# Altium PCB io9_idc.PcbDoc
Units mm, origin at the board's own origin, x right, y up, seen from the top; angles counter-clockwise.
Board outline 115.8 x 140.7 mm, 2 copper layers (Top Layer, Bottom Layer); 22 components, 84 nets, 391 pads, 198 vias.
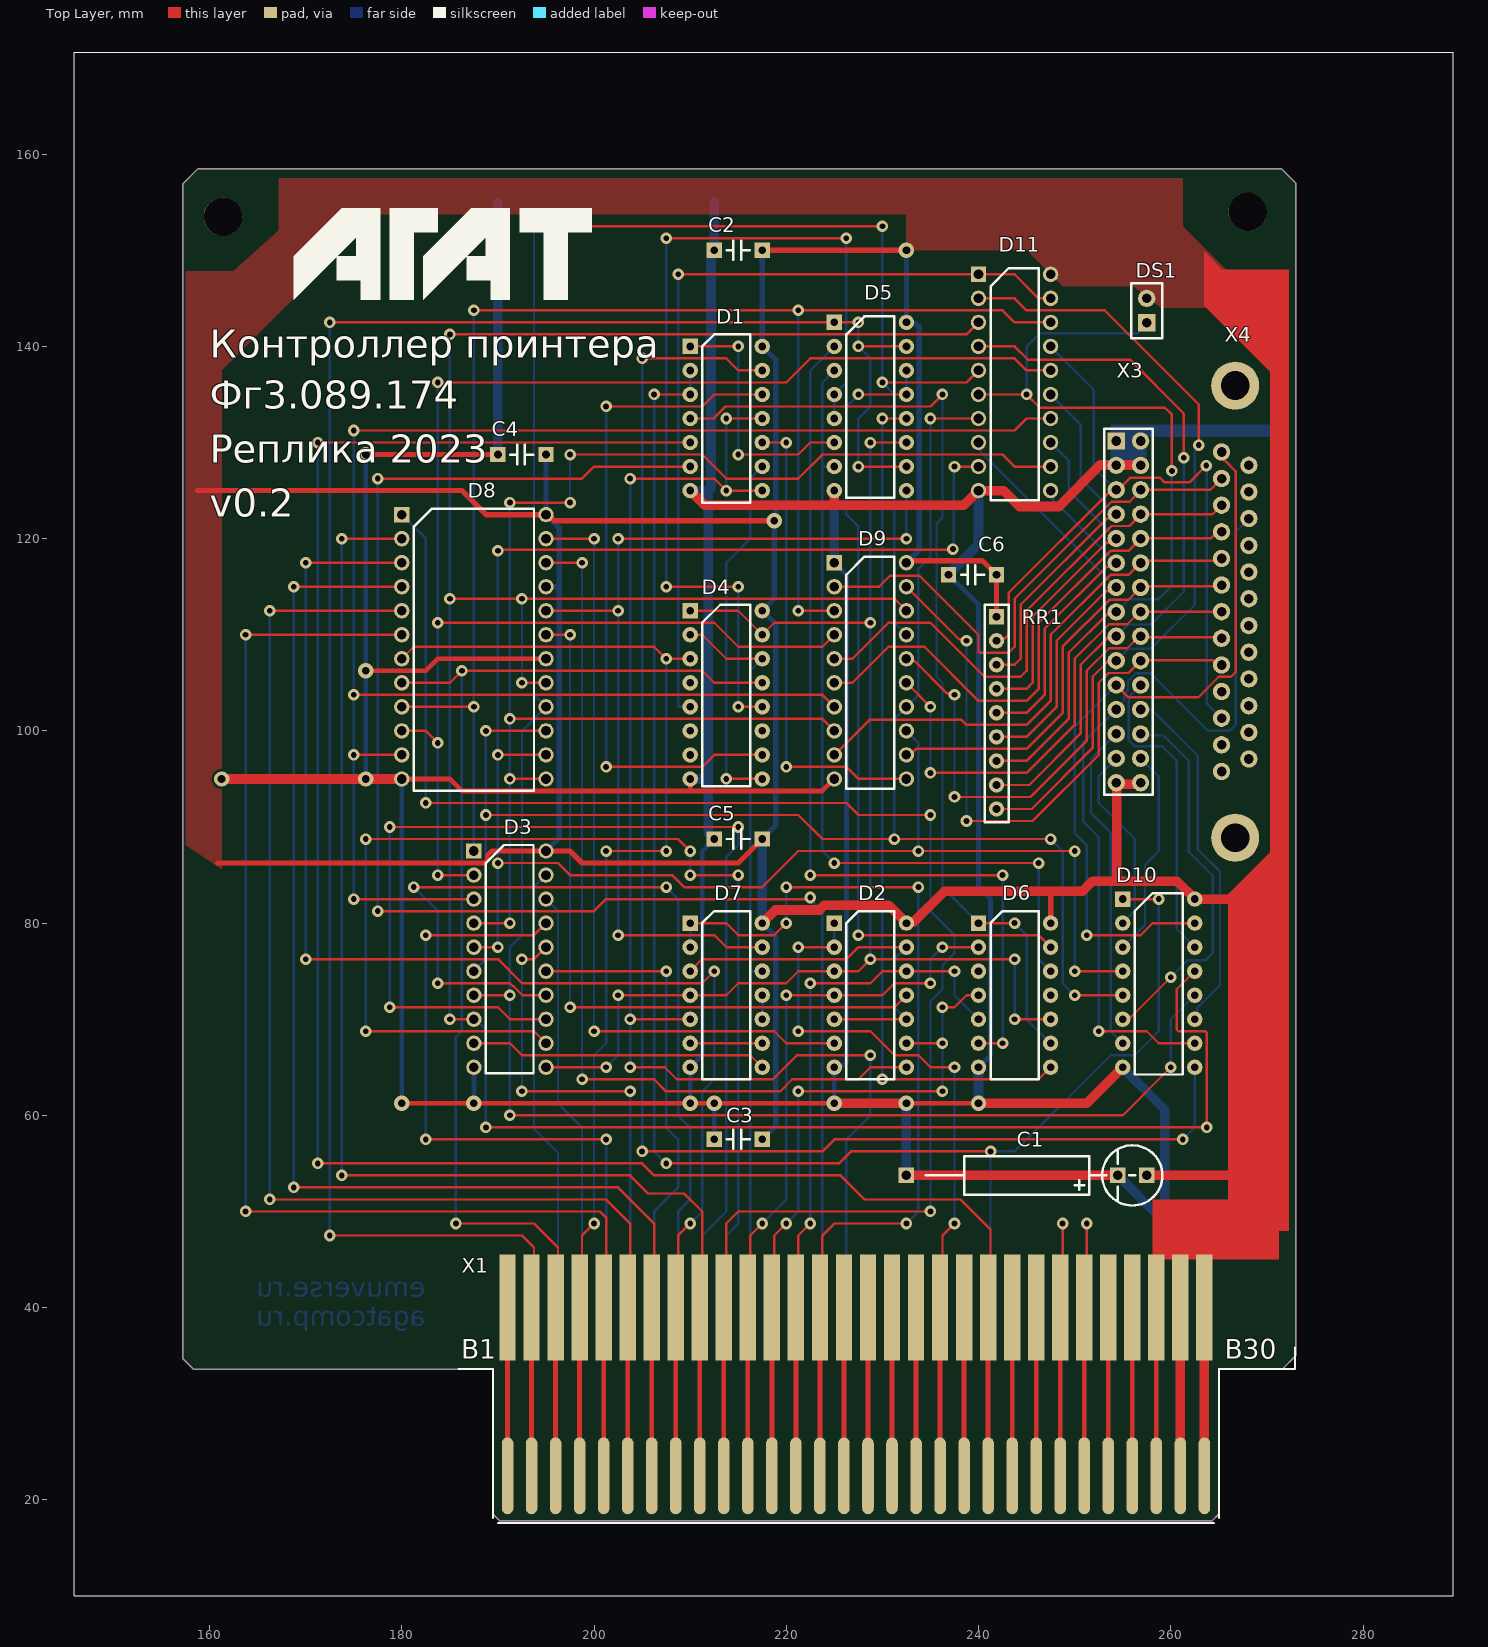
[diagram p0: Top Layer view]
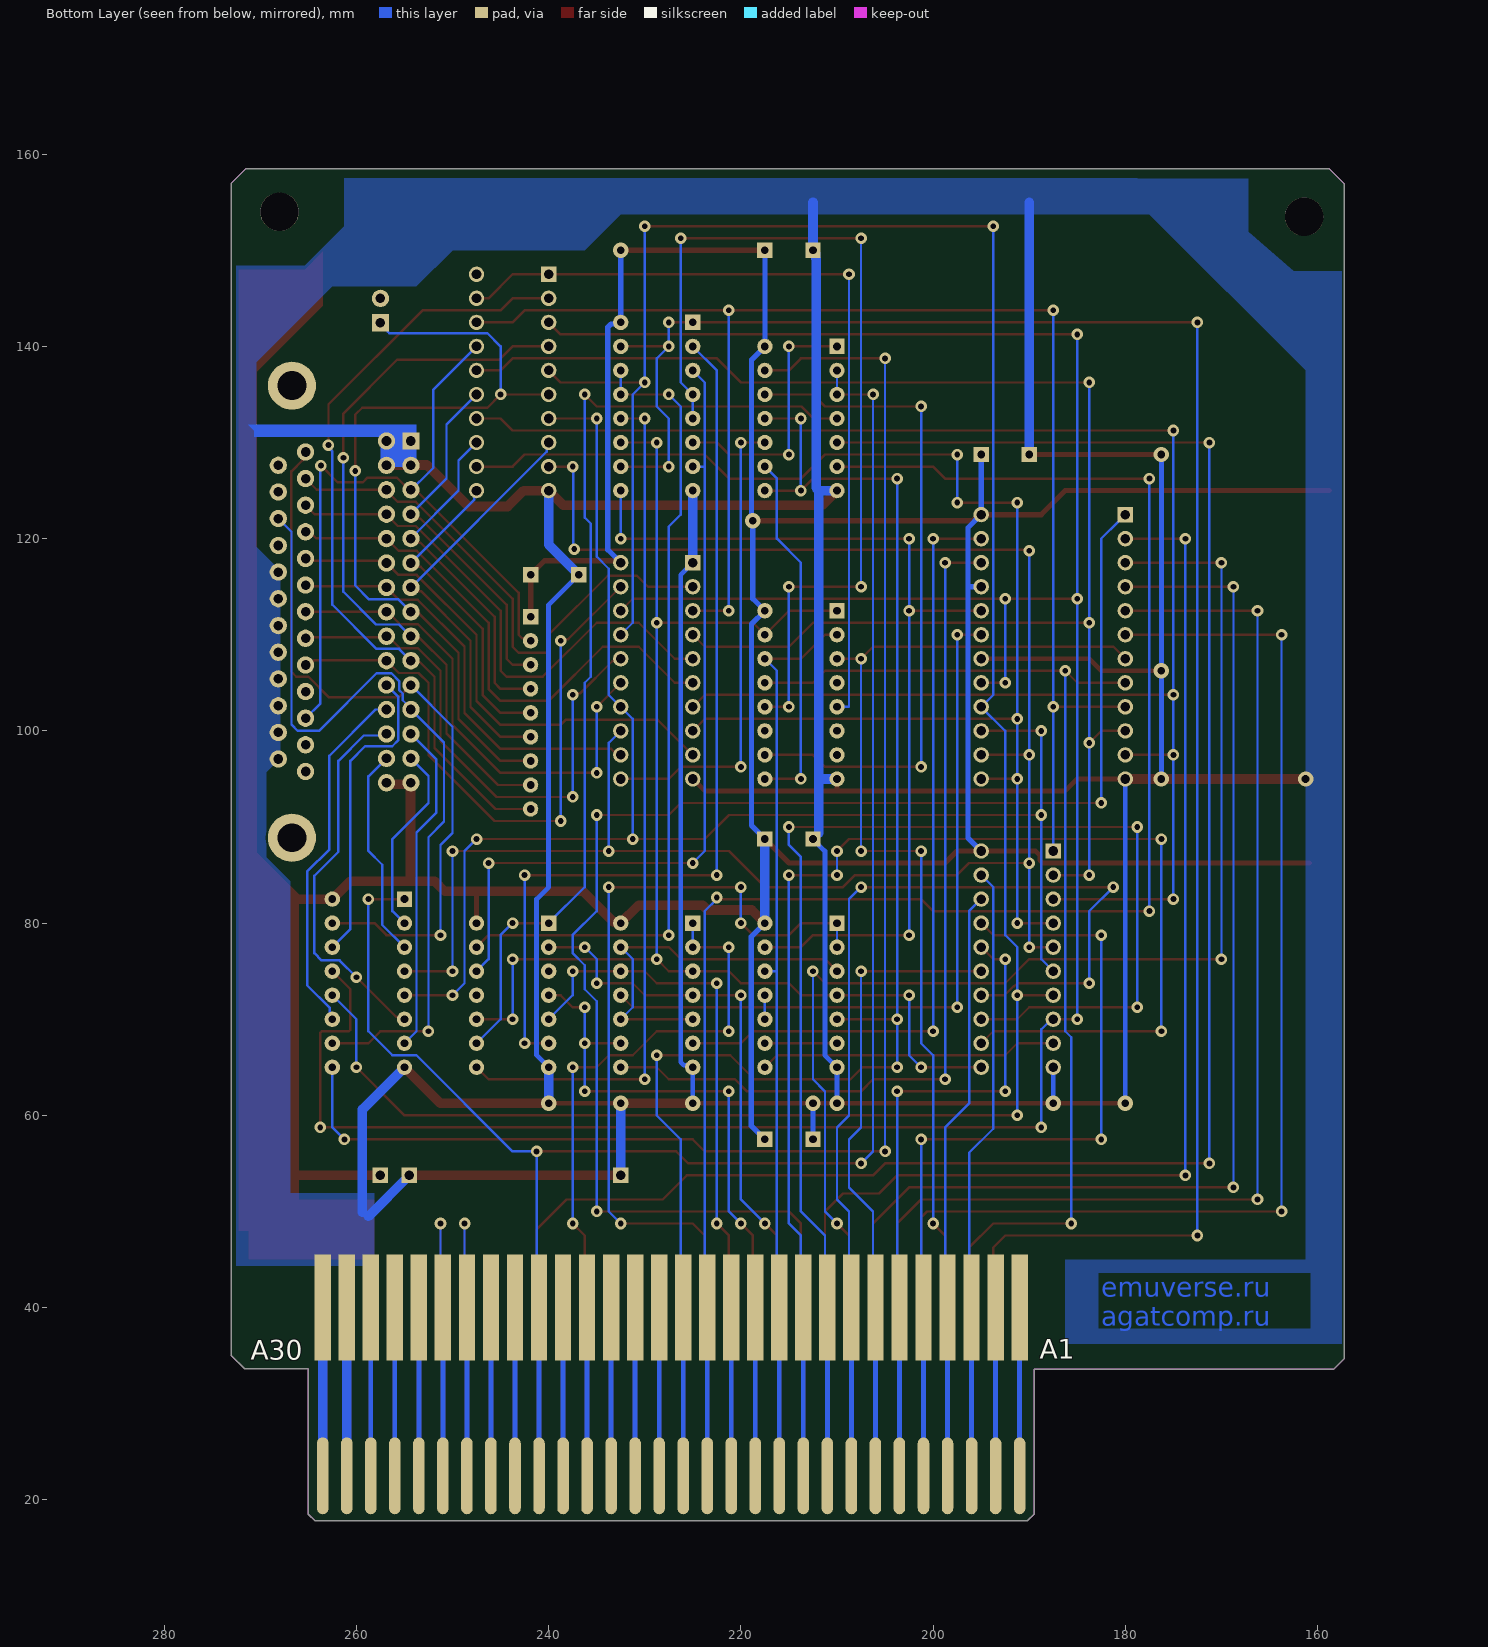
[diagram p1: Bottom Layer view, seen from below]

## Layer stack, top to bottom
Top Solder: solder mask 0.0102, Solder Resist, Dk 3.5
Top Layer: signal copper 0.0356
Dielectric 1: dielectric 0.32, FR-4, Dk 4.8
Bottom Layer: signal copper 0.0356
Bottom Solder: solder mask 0.0102, Solder Resist, Dk 3.5

## Board outline
157.2,34.7 158.3,33.6 189.5,33.6 189.5,18.5 190.2,17.8 264.3,17.8 265,18.5 265,33.625 271.625,33.625 273,35 273,157 271.5,158.5 158.8,158.5 157.2,156.9

## Design rules (kind name [scope] priority, off if disabled: settings)
Clearance [All] p1: gap=0.254 ignorepadtopadclearanceinfootprint=FALSE except(0: Arc-Hole Track-Hole SMDPad-Hole THPad-Hole Via-Hole Fill-Hole Poly-Hole Region-Hole Text-Hole; 0.2: Arc-Arc Arc-Track Arc-SMDPad Arc-THPad Arc-Via Arc-Fill Arc-Poly Arc-Region Arc-Text Track-Track Track-SMDPad Track-THPad Track-Via Track-Fill Track-Poly Track-Region Track-Text)
HoleSize [All] p1: absolutevalues=TRUE maxlimit=5 minlimit=0.025 maxpercent=80.000 minpercent=20.000
PolygonConnect [All] p1: connectstyle=Direct reliefconductorwidth=0.254 reliefentries=4 polygonreliefangle="90 Angle" airgapwidth=0.254
RoutingVias [All] p1: holewidth=0.711 width=1.27 viastyle="Through Hole" minholewidth=0.711 minwidth=1.27 maxholewidth=0.711 maxwidth=1.27
SilkToSilkClearance [All] p1: silktosilkclearance=0.2
SilkToSolderMaskClearance [IsPad] p1: minsilkscreentomaskgap=0.2 clearancetoexposedcopper=TRUE
SolderMaskExpansion [All] p1: expansion=0.102 istentingtop=FALSE
Width [All] p1: maxlimit=2 minlimit=0.2 preferedwidth=0.25
27 further rules are at their usual default settings.

## Components (designator, comment, footprint, x,y, rotation, side; value= is the part's Value field where it differs from the comment)
C1 "47,0 х 16 в" CP30 257.5,53.75 r270 top
C2 "0,1 мкф" C5 212.5,150 r90 top
C3 "0,1 мкф" C5 212.5,57.5 r90 top
C4 "0,1 мкф" C5 190,128.75 r90 top
C5 "0,1 мкф" C5 212.5,88.75 r90 top
C6 "0,1 мкф" C5 236.875,116.25 r90 top
D1 "К555ЛЕ1" 201.14 210,140 r0 top
D2 "К555ЛЛ1" 201.14 225,80 r0 top
D3 "КР580ВА86" 2140.20 187.5,87.5 r0 top
D4 "К555ИД4" 201.16 210,112.5 r0 top
D5 "КР559ИП7" 201.16 225,142.5 r0 top
D6 "К555ЛИ6" 201.14 240,80 r0 top
D7 "К555ЛА3" 201.14 210,80 r0 top
D8 "К573РФ2" "2120.24 socket" 180,122.5 r0 top
D9 "К555ИР27" 201.20 225,117.5 r0 top
D10 "К555ТМ8" 201.16 255,82.5 r0 top
D11 "К555АП5" 201.20 240,147.5 r0 top
DS1 "HEADER_2x1" HEADER_2X1 257.5,142.46 r90 top
RR1 "1 к" НР1-4-8 241.875,111.875 r0 top
X1 "Agat-Ext-io9" AGAT_EXT 31.646,17.33 r0 top
X3 "IDC-30" IDC30 254.329,130.165 r270 top
X4 "DB25" DB25 265.285,129.02 r0 top

## Footprints (in the part's own frame and the unit in brackets; to place one, negate y for a bottom-side part, rotate by r counter-clockwise, add the part's x,y. Pads: shape width x height; smd on the part's side, far side on the other; paste and mask are expansions set on the pad)
201.14 [mm]
  rect 1.6x1.6 hole 0.8: 1(0,0)
  round 1.6 hole 0.8: 2(0,-2.5) 3(0,-5) 4(0,-7.5) 5(0,-10) 6(0,-12.5) 7(0,-15) 8(7.5,-15) 9(7.5,-12.5) 10(7.5,-10) 11(7.5,-7.5) 12(7.5,-5) 13(7.5,-2.5) 14(7.5,0)
  silkscreen extent 1.25,-16.25 6.25,1.25, body extent -0.13,-16.55 7.63,1.55, height 4.5
201.16 [mm]
  rect 1.6x1.6 hole 0.8: 1(0,0)
  round 1.6 hole 0.8: 2(0,-2.5) 3(0,-5) 4(0,-7.5) 5(0,-10) 6(0,-12.5) 7(0,-15) 8(0,-17.5) 9(7.5,-17.5) 10(7.5,-15) 11(7.5,-12.5) 12(7.5,-10) 13(7.5,-7.5) 14(7.5,-5) 15(7.5,-2.5) 16(7.5,0)
  silkscreen extent 1.25,-18.25 6.25,0.63, body extent -0.13,-19.05 7.63,1.55, height 4.5
201.20 [mm]
  rect 1.6x1.6 hole 1: 1(0,0)
  round 1.6 hole 1: 2(0,-2.5) 3(0,-5) 4(0,-7.5) 5(0,-10) 6(0,-12.5) 7(0,-15) 8(0,-17.5) 9(0,-20) 10(0,-22.5) 11(7.5,-22.5) 12(7.5,-20) 13(7.5,-17.5) 14(7.5,-15) 15(7.5,-12.5) 16(7.5,-10) 17(7.5,-7.5) 18(7.5,-5) 19(7.5,-2.5) 20(7.5,0)
  silkscreen extent 1.25,-23.5 6.25,0.63, body extent 0.02,-24.2 7.78,1.4, height 4.5
"2120.24 socket" [mm]
  rect 1.6x1.6 hole 1: 1(0,0)
  round 1.6 hole 1: 2(0,-2.5) 3(0,-5) 4(0,-7.5) 5(0,-10) 6(0,-12.5) 7(0,-15) 8(0,-17.5) 9(0,-20) 10(0,-22.5) 11(0,-25) 12(0,-27.5) 13(15,-27.5) 14(15,-25) 15(15,-22.5) 16(15,-20) 17(15,-17.5) 18(15,-15) 19(15,-12.5) 20(15,-10) 21(15,-7.5) 22(15,-5) 23(15,-2.5) 24(15,0)
  silkscreen extent 1.25,-28.75 13.75,0.63, body extent -1.39,-28.98 16.39,1.5, height 8.2
2140.20 [mm]
  rect 1.6x1.6 hole 1: 1(0,0)
  round 1.6 hole 1: 2(0,-2.5) 3(0,-5) 4(0,-7.5) 5(0,-10) 6(0,-12.5) 7(0,-15) 8(0,-17.5) 9(0,-20) 10(0,-22.5) 11(7.5,-22.5) 12(7.5,-20) 13(7.5,-17.5) 14(7.5,-15) 15(7.5,-12.5) 16(7.5,-10) 17(7.5,-7.5) 18(7.5,-5) 19(7.5,-2.5) 20(7.5,0)
  silkscreen extent 1.25,-23.1 6.2,0.63, body extent -0.1,-23.5 7.77,1.1, height 4.36
AGAT_EXT [mm]
  rrect100% 1.2x8 smd far side: A1(159.354,5.17) A2(161.854,5.17) A3(164.354,5.17) A4(166.854,5.17) A5(169.354,5.17) A6(171.854,5.17) A7(174.354,5.17) A8(176.854,5.17) A9(179.354,5.17) A10(181.854,5.17) A11(184.354,5.17) A12(186.854,5.17) A13(189.354,5.17) A14(191.854,5.17) A15(194.354,5.17) A16(196.854,5.17) A17(199.354,5.17) A18(201.854,5.17) A19(204.354,5.17) A20(206.854,5.17) A21(209.354,5.17) A22(211.854,5.17) A23(214.354,5.17) A24(216.854,5.17) A25(219.354,5.17) A26(221.854,5.17) A27(224.354,5.17) A28(226.854,5.17) A29(229.354,5.17) A30(231.854,5.17)
  rect 1.7x11 smd far side: A1(159.354,22.67) A2(161.854,22.67) A3(164.354,22.67) A4(166.854,22.67) A5(169.354,22.67) A6(171.854,22.67) A7(174.354,22.67) A8(176.854,22.67) A9(179.354,22.67) A10(181.854,22.67) A11(184.354,22.67) A12(186.854,22.67) A13(189.354,22.67) A14(191.854,22.67) A15(194.354,22.67) A16(196.854,22.67) A17(199.354,22.67) A18(201.854,22.67) A19(204.354,22.67) A20(206.854,22.67) A21(209.354,22.67) A22(211.854,22.67) A23(214.354,22.67) A24(216.854,22.67) A25(219.354,22.67) A26(221.854,22.67) A27(224.354,22.67) A28(226.854,22.67) A29(229.354,22.67) A30(231.854,22.67)
  rrect100% 1.2x8 smd: B1(159.354,5.17) B2(161.854,5.17) B3(164.354,5.17) B4(166.854,5.17) B5(169.354,5.17) B6(171.854,5.17) B7(174.354,5.17) B8(176.854,5.17) B9(179.354,5.17) B10(181.854,5.17) B11(184.354,5.17) B12(186.854,5.17) B13(189.354,5.17) B14(191.854,5.17) B15(194.354,5.17) B16(196.854,5.17) B17(199.354,5.17) B18(201.854,5.17) B19(204.354,5.17) B20(206.854,5.17) B21(209.354,5.17) B22(211.854,5.17) B23(214.354,5.17) B24(216.854,5.17) B25(219.354,5.17) B26(221.854,5.17) B27(224.354,5.17) B28(226.854,5.17) B29(229.354,5.17) B30(231.854,5.17)
  rect 1.7x11 smd: B1(159.354,22.67) B2(161.854,22.67) B3(164.354,22.67) B4(166.854,22.67) B5(169.354,22.67) B6(171.854,22.67) B7(174.354,22.67) B8(176.854,22.67) B9(179.354,22.67) B10(181.854,22.67) B11(184.354,22.67) B12(186.854,22.67) B13(189.354,22.67) B14(191.854,22.67) B15(194.354,22.67) B16(196.854,22.67) B17(199.354,22.67) B18(201.854,22.67) B19(204.354,22.67) B20(206.854,22.67) B21(209.354,22.67) B22(211.854,22.67) B23(214.354,22.67) B24(216.854,22.67) B25(219.354,22.67) B26(221.854,22.67) B27(224.354,22.67) B28(226.854,22.67) B29(229.354,22.67) B30(231.854,22.67)
  Top Layer lines w0.5: 159.354,8.97 159.354,18 ; 161.854,8.77 161.854,18 ; 164.354,8.87 164.354,18 ; 166.5,18 166.854,17.646 166.854,8.77 ; 169.354,8.77 169.354,18 ; 171.854,8.97 171.854,17.5 ; 174.354,8.87 174.354,17.5 ; 176.854,8.77 176.854,17.5 ; 179.354,9.27 179.354,17.5 ; 181.854,8.97 181.854,17.5 ; 184.354,9.07 184.354,17.5 ; 186.854,8.77 186.854,17.5 ; 189.354,8.77 189.354,17.5 ; 191.854,8.77 191.854,17.5 ; 194.354,8.77 194.354,17.5 ; 196.854,8.77 196.854,17.5 ; 199.354,8.77 199.354,17.5 ; 201.854,8.77 201.854,17.5 ; 204.354,8.77 204.354,17.5 ; 206.854,8.77 206.854,17.5 ; 209.354,8.77 209.354,17.5 ; 211.854,8.87 211.854,17.5 ; 214.354,8.77 214.354,17.5 ; 216.854,8.97 216.854,17.5 ; 219.354,8.77 219.354,17.5 ; 221.854,8.77 221.854,17.5 ; 224.354,8.87 224.354,17.5 ; 226.854,8.77 226.854,17.5
  Top Layer lines w1: 229.354,8.77 229.354,17.5 ; 231.854,8.77 231.854,17.5
  Bottom Layer lines w0.5: 159.354,8.97 159.354,17.5 ; 161.854,8.77 161.854,17.5 ; 164.354,8.97 164.354,18 ; 166.854,8.77 166.854,17.5 ; 169.354,8.77 169.354,17.5 ; 171.854,8.87 171.854,18 ; 174.354,8.97 174.354,17.5 ; 176.854,8.77 176.854,17.5 ; 179.354,9.07 179.354,17.5 ; 181.854,9.17 181.854,17.5 ; 184.354,8.87 184.354,18 ; 186.854,8.77 186.854,17.5 ; 189.354,8.77 189.354,18 ; 191.854,8.77 191.854,17.5 ; 194.354,8.77 194.354,17.5 ; 196.854,8.77 196.854,18 ; 199.354,8.77 199.354,18 ; 201.854,8.77 201.854,18 ; 204.354,8.77 204.354,17.5 ; 206.854,8.77 206.854,17.5 ; 209.354,8.77 209.354,17.5 ; 211.854,8.87 211.854,18 ; 214.354,8.77 214.354,17.5 ; 216.854,8.87 216.854,17.5 ; 219.354,8.77 219.354,17.5 ; 221.854,8.77 221.854,17.5 ; 224.354,8.87 224.354,18 ; 226.854,8.77 226.854,17.5
  Bottom Layer lines w1: 229.354,8.77 229.354,18 ; 231.854,8.77 231.854,17.5
  silkscreen extent 154.27,0.27 241.3,18.5
C5 [mm]
  rect 1.6x1.6 hole 0.8: 1(0,0) 2(0,-5)
  silkscreen extent -1,-3.7 1,-1.3, body extent -1.05,-5.54 1.05,0.46, height 8.1
CP30 [mm]
  rect 1.6x1.6 hole 1: 1(0,0) 2(0,-3) 2(0,-25)
  silkscreen extent -3.13,-23 3.13,1.63, body extent -2.56,-25.42 2.56,0.42, height 5.86
DB25 [mm]
  round 5 hole 3: 0(1.42,-40.14) 0(1.42,6.9)
  round 1.8 hole 1: 1(0,0) 2(0,-2.77) 3(0,-5.54) 4(0,-8.31) 5(0,-11.08) 6(0,-13.85) 7(0,-16.62) 8(0,-19.39) 9(0,-22.16) 10(0,-24.93) 11(0,-27.7) 12(0,-30.47) 13(0,-33.24) 14(2.84,-1.39) 15(2.84,-4.16) 16(2.84,-6.93) 17(2.84,-9.73) 18(2.84,-12.5) 19(2.84,-15.27) 20(2.84,-18.07) 21(2.84,-20.84) 22(2.84,-23.61) 23(2.84,-26.41) 24(2.84,-29.18) 25(2.84,-31.95)
  body extent -1.08,-43.22 17.32,9.82, height 12.5
HEADER_2X1 [mm]
  rect 1.8x1.8 hole 1: 1(0,0)
  round 1.8 hole 1: 2(2.54,0)
  silkscreen extent -1.6,-1.6 4.1,1.6, body extent -1.27,-1.25 3.81,1.25, height 8.73
IDC30 [mm]
  rect 1.8x1.8 hole 1: 1(0,0)
  round 1.8 hole 1: 2(0,2.54) 3(2.54,0) 4(2.54,2.54) 5(5.08,0) 6(5.08,2.54) 7(7.62,0) 8(7.62,2.54) 9(10.16,0) 10(10.16,2.54) 11(12.7,0) 12(12.7,2.54) 13(15.24,0) 14(15.24,2.54) 15(17.78,0) 16(17.78,2.54) 17(20.32,0) 18(20.32,2.54) 19(22.86,0) 20(22.86,2.54) 21(25.4,0) 22(25.4,2.54) 23(27.94,0) 24(27.94,2.54) 25(30.48,0) 26(30.48,2.54) 27(33.02,0) 28(33.02,2.54) 29(35.56,0) 30(35.56,2.54)
  silkscreen extent -1.27,-1.27 36.8,3.81, body extent -5.17,-3.23 40.73,5.67, height 9
НР1-4-8 [mm]
  rect 1.6x1.6 hole 0.8: 1(0,0)
  round 1.6 hole 0.8: 2(0,-2.5) 3(0,-5) 4(0,-7.5) 5(0,-10) 6(0,-12.5) 7(0,-15) 8(0,-17.5) 9(0,-20)
  silkscreen extent -1.25,-21.4 1.25,1.25, body extent -1.25,-21.44 1.25,1.37, height 4.93

## Part data
C1: library part К53-14, "К53-14"
C2 C3 C4 C5 C6: library part К10-17, "К10-17"
D1 D2 D5 D6: ManufacturerPartNumber=К555ЛА3
RR1: library part НР1-4-8, ManufacturerPartNumber=НР1-4-8
X3: library part IO9_IDC30
X4: library part DB25_LPT
D4: ManufacturerPartNumber=К555ИД4
D7: ManufacturerPartNumber=К555ЛА3
D10: ManufacturerPartNumber=К555ТМ8
DS1: ManufacturerPartNumber=HEADER_2x1

## Free pads (board coordinates)
  round 4 hole 4 unplated: 0(161.4,153.5) 0(268,154)

## Via types
v1: diameter 1.2, hole 0.6, Top Layer to Bottom Layer, 185 vias
v2: diameter 1.6, hole 0.8, Top Layer to Bottom Layer, 13 vias

## Nets (pads, with @x,y where several pads share a name; then routed paths per layer and width w, separated by ;. In a path a pad name is that pad's centre, name@x,y a point inside that pad or via, vN(x,y) a via of type N, cw(c..) or ccw(c..) an arc to the next point about the centre after c; other vN are vias at no path point)
2M: D1.8 D1.11 D7.5 X1.A15 | length 141.9
  Top Layer w0.25: v1(203.75,65) 207.354,65 208.604,63.75 218.604,63.75 221.104,66.25 v1(228.75,66.25) ; v1(203.75,70) D7.5 ; v1(203.75,126.25) 212.5,126.25 v1(213.75,125) D1.8 ; v1(213.75,132.5) D1.11
  Bottom Layer w0.25: v1(203.75,65) v1(203.75,126.25) ; v1(213.75,125) v1(213.75,132.5) ; X1.A15@226.25,45 226.25,57.5 228.75,60 v1(228.75,66.25)
+5В: C1.1 C2.2 C3.2 C4.2 C5.2 C6.2 D1.14 D2.14 D3.20 D4.16 D5.16 D6.14 D7.14 D8.21 D8.24 D9.20 D10.16 D11.20 DS1.2 RR1.1 X1.B28 X1.B29 X1.B30 X3.29 X3.30 | length 401.6
  Top Layer w0.5: 160.808,86.26 186.503,86.26 186.514,86.25 188.595,86.25 188.898,86.553 188.898,87.068 189.33,87.5 D3.20
  Top Layer w0.55: 158.75,125 186.25,125 188.75,122.5 D8.24 195.222,122.5 195.847,121.875 v2(218.75,121.875) ; D3.20 197.5,87.5 198.75,86.25 215,86.25 C5.2 ; C2.2 v2(232.5,150) ; D9.20 232.701,117.701 233.346,117.701 ; 233.347,117.702 240.423,117.702 C6.2 RR1.1 ; D6.14 247.5,83.125
  Top Layer w1: D7.14 218.866,81.366 223.468,81.366 223.977,81.875 230.625,81.875 D2.14 232.615,80.115 233.24,80.115 236.442,83.317 250.817,83.317 251.875,84.375 254.375,84.375 ; X3.30@256.869,94.44 254.375,94.44 254.375,84.375 ; C1.1 262.5,53.75 266.25,53.75 ; 266.875,82.5 D10.16 260.625,84.375 254.375,84.375
  Bottom Layer w0.55: D3.20 196.368,88.868 196.368,115 ; D8.21 196.368,115 ; C4.2 D8.24 196.368,121.132 196.368,115 ; C3.2 218.909,58.909 218.909,78.591 D7.14 ; C5.2 218.899,90.149 218.899,111.101 D4.16 218.75,113.75 v2(218.75,121.875) 218.902,122.027 218.902,138.598 D1.14 C2.2 ; D9.20 233.843,118.843 233.843,142.001 233.521,142.323 232.677,142.323 D5.16 v2(232.5,150)
  Bottom Layer w1: D7.14 C5.2
A0: D4.13 D8.8 X1.B3 | length 109.2
  Top Layer w0.25: D8.8 185,105 v1(186.25,106.25) 211.25,106.25 212.5,105 D4.13 ; v1(185.625,48.75) 193.75,48.75 196.25,46.25 X1.B3@196.25,45
  Bottom Layer w0.25: v1(185.625,48.75) 185.625,68.125 186.25,68.75 v1(186.25,106.25)
A1: D4.3 D8.7 X1.B4 | length 100.8
  Top Layer w0.25: D8.7 181.25,108.75 206.25,108.75 v1(207.5,107.5) D4.3 ; X1.B4@198.75,45 198.75,47.5 v1(200,48.75) ; v1(201.25,87.5) v1(207.5,87.5)
  Bottom Layer w0.25: v1(200,48.75) 200,66.25 201.25,67.5 v1(201.25,87.5) ; v1(207.5,87.5) v1(207.5,107.5)
A2: D8.6 X1.B5 | length 118.4
  Top Layer w0.25: v1(163.75,50) 200.625,50 201.25,49.375 X1.B5@201.25,45 ; v1(163.75,110) D8.6
  Bottom Layer w0.25: v1(163.75,50) v1(163.75,110)
A3: D8.5 X1.B6 | length 117.3
  Top Layer w0.25: v1(166.25,51.25) 201.25,51.25 203.75,48.75 X1.B6@203.75,45 ; v1(166.25,112.5) D8.5
  Bottom Layer w0.25: v1(166.25,51.25) v1(166.25,112.5)
A4: D8.4 X1.B7 | length 116.6
  Top Layer w0.25: v1(168.75,52.5) 202.5,52.5 206.25,48.75 X1.B7@206.25,45 ; v1(168.75,115) D8.4
  Bottom Layer w0.25: v1(168.75,52.5) v1(168.75,115)
A5: D8.3 X1.B8 | length 126.9
  Top Layer w0.25: v1(170,76.25) 190,76.25 192.5,73.75 211.25,73.75 v1(212.5,75) ; v1(170,117.5) D8.3 ; X1.B8@208.75,45 208.75,47.5 v1(210,48.75)
  Bottom Layer w0.25: v1(170,76.25) v1(170,117.5) ; v1(210,48.75) 211.25,50 211.25,62.5 212.5,63.75 v1(212.5,75)
A6: D8.2 X1.B9 | length 121.6
  Top Layer w0.25: v1(173.75,53.75) 203.75,53.75 205.625,51.875 209.375,51.875 211.25,50 X1.B9@211.25,40 ; v1(173.75,120) D8.2
  Bottom Layer w0.25: v1(173.75,53.75) v1(173.75,120)
A7: D8.1 X1.B10 | length 152.9
  Top Layer w0.25: v1(182.5,92.5) 226.25,92.5 227.5,91.25 v1(235,91.25) ; X1.B10@213.75,45 213.75,48.75 215,50 v1(235,50)
  Bottom Layer w0.25: D8.1 180.675,121.825 182.5,120 v1(182.5,92.5) ; v1(235,50) 235,71.875 236.25,73.125 236.25,75.625 237.5,76.875 237.5,78.75 235,81.25 v1(235,91.25)
A8: D2.4 D6.2 X1.B11 | length 52.6
  Top Layer w0.25: X1.B11@216.25,45 216.25,47.5 v1(217.5,48.75) ; v1(220,72.5) D2.4 230,72.5 231.25,73.75 v1(235,73.75) ; v1(236.25,77.5) D6.2
  Bottom Layer w0.25: v1(217.5,48.75) 220,51.25 v1(220,72.5) ; v1(235,73.75) 235,76.25 v1(236.25,77.5)
A9: D2.9 D6.4 X1.B12 | length 50.3
  Top Layer w0.25: X1.B12@218.75,45 218.75,47.5 v1(220,48.75) ; v1(221.25,62.5) v1(236.25,62.5) ; D2.9 v1(236.25,67.5) ; v1(236.25,71.25) 237.5,71.25 238.75,72.5 D6.4
  Bottom Layer w0.25: v1(220,48.75) 221.25,50 v1(221.25,62.5) ; v1(236.25,62.5) v1(236.25,71.25)
A10: D2.12 D6.5 X1.B13 | length 50.8
  Top Layer w0.25: X1.B13@221.25,45 221.25,47.5 v1(222.5,48.75) ; v1(222.5,73.75) 228.75,73.75 230,75 D2.12 v1(237.5,75)
  Bottom Layer w0.25: v1(222.5,48.75) v1(222.5,73.75) ; v1(237.5,75) 237.5,72.5 D6.5
A11: D7.1 D7.2 X1.B14 | length 78.3
  Top Layer w0.25: D7.1 213.75,80 215,78.75 218.75,78.75 v1(220,80) ; v1(220,83.75) v1(233.75,83.75) ; X1.B14@223.75,45 223.75,47.5 225,48.75 v1(232.5,48.75)
  Bottom Layer w0.25: D7.2 D7.1 ; v1(220,80) v1(220,83.75) ; v1(232.5,48.75) 233.75,50 v1(233.75,83.75)
BD0: D3.19 X1.A3 | length 46.6
  Bottom Layer w0.25: D3.19 193.75,83.75 193.75,58.603 196.25,56.104 X1.A3@196.25,40
BD1: D3.18 X1.A4 | length 39.1
  Bottom Layer w0.25: D3.18 196.25,81.25 196.25,61.25 198.75,58.75 X1.A4@198.75,45
BD2: D3.17 X1.A5 | length 65.5
  Top Layer w0.25: v1(182.5,57.5) v1(201.25,57.5) ; v1(182.5,78.75) 193.75,78.75 D3.17
  Bottom Layer w0.25: v1(182.5,57.5) v1(182.5,78.75) ; X1.A5@201.25,45 v1(201.25,57.5)
BD3: D3.16 X1.A6 | length 45.5
  Top Layer w0.25: v1(192.5,62.5) v1(203.75,62.5) ; v1(192.5,76.25) 193.75,76.25 D3.16
  Bottom Layer w0.25: v1(192.5,62.5) v1(192.5,76.25) ; X1.A6@203.75,45 v1(203.75,62.5)
BD4: D3.15 X1.A7 | length 44.1
  Top Layer w0.25: D3.15 v1(207.5,75)
  Bottom Layer w0.25: X1.A7@206.25,45 206.25,50 208.75,52.5 208.75,57.5 207.5,58.75 v1(207.5,75)
BD5: D3.14 X1.A8 | length 89.4
  Top Layer w0.25: v1(181.25,83.75) v1(207.5,83.75) ; v1(183.75,73.75) 191.25,73.75 191.575,73.425 191.633,73.425 192.558,72.5 D3.14
  Bottom Layer w0.25: v1(181.25,83.75) 183.75,81.25 v1(183.75,73.75) ; v1(207.5,83.75) 208.75,82.5 208.75,60 210,58.75 210,51.25 208.75,50 X1.A8@208.75,45
BD6: D3.13 X1.A9 | length 118.3
  Top Layer w0.25: v1(178.75,71.25) 190,71.25 191.25,70 D3.13 ; v1(178.75,90) v1(215,90)
  Bottom Layer w0.25: v1(178.75,71.25) v1(178.75,90) ; X1.A9@211.25,45 211.25,47.5 213.75,50 213.75,86.875 215,88.125 v1(215,90)
BD7: D3.12 X1.A10 | length 121.6
  Top Layer w0.25: v1(176.25,68.75) 193.75,68.75 D3.12 ; v1(176.25,88.75) 208.75,88.75 v1(210,87.5) ; v1(210,85) v1(215,85)
  Bottom Layer w0.25: v1(176.25,68.75) v1(176.25,88.75) ; v1(210,85) v1(210,87.5) ; X1.A10@213.75,45 213.75,47.5 215,48.75 v1(215,85)
BRW: D2.1 D2.2 X1.B19 | length 54.6
  Top Layer w0.25: v1(221.25,68.75) 228.75,68.75 231.25,66.25 233.75,66.25 235,65 v1(237.5,65) ; v1(221.25,77.5) D2.2 ; X1.B19@236.25,43.75 236.25,47.5 v1(237.5,48.75)
  Bottom Layer w0.25: v1(221.25,68.75) v1(221.25,77.5) ; D2.2 D2.1 ; v1(237.5,48.75) v1(237.5,65)
CT1: D11.2 RR1.9 X3.19 | length 82.2
  Top Layer w0.25: D11.2 243.75,145 245,143.75 253.125,143.75 262.9,133.975 v1@262.9,129.745 ; RR1.9 245.533,91.875 251.875,98.217 251.875,105.625 253.39,107.14 X3.19@254.329,107.14
  Bottom Layer w0.25: X3.19 255.554,108.53 257.905,108.53 262.5,113.125 262.5,129.08 262.909,129.488 v1(262.909,129.736)
CT2: D11.4 RR1.8 X3.17 | length 74.7
  Top Layer w0.25: D11.4 243.75,140 245.125,138.625 255.75,138.625 261.353,133.022 v1(261.353,128.419) ; RR1.8 245.273,94.375 250.625,99.727 250.625,106.875 253.43,109.68 X3.17@254.329,109.68
  Bottom Layer w0.25: X3.17 255.554,111.07 257.945,111.07 261.353,114.478 v1(261.353,128.419)
CT3: D11.6 DS1.1 RR1.7 X3.15 | length 87.1
  Top Layer w0.25: D11.6 v1(245,135) 246.375,133.625 259.397,133.625 260.121,132.902 v1(260.121,127.046) ; RR1.7 245,96.875 249.375,101.25 249.375,108.125 253.47,112.22 X3.15@254.329,112.22
  Bottom Layer w0.25: v1(245,135) 245,140 246.375,141.375 256.579,141.375 256.725,141.521 256.725,141.685 DS1.1 ; X3.15 255.625,113.681 258.681,113.681 260.121,115.121 v1(260.121,127.046)
CT4: D11.8 RR1.6 X3.13 | length 43.4
  Top Layer w0.25: RR1.6 245,99.375 248.125,102.5 248.125,109.375 253.291,114.541 X3.13@253.945,114.541
  Bottom Layer w0.25: D11.8 240.207,129.793 240.207,129.046 X3.13
CT5: D11.11 RR1.5 X3.11 | length 33.3
  Top Layer w0.25: RR1.5 245,101.875 246.875,103.75 246.875,110.625 253.311,117.061 253.925,117.061 X3.11
  Bottom Layer w0.25: D11.11 247.727,124.773 247.727,124.066 X3.11
CT6: D11.13 RR1.4 X3.9 | length 35.8
  Top Layer w0.25: RR1.4 245,104.375 245.625,105 245.625,111.875 253.331,119.581 253.905,119.581 X3.9
  Bottom Layer w0.25: D11.13 249.375,128.125 249.375,125 X3.9@254.349,120.026
CT7: D11.15 RR1.3 X3.7 | length 38.2
  Top Layer w0.25: RR1.3 243.75,106.875 244.375,107.5 244.375,113.125 253.351,122.101 253.885,122.101 X3.7
  Bottom Layer w0.25: D11.15 250.625,131.875 250.625,126.25 X3.7@254.786,122.089
CT8: D11.17 RR1.2 X3.5 X4.11 | length 77.7
  Top Layer w0.25: RR1.2 242.133,109.633 242.758,109.633 243.125,110 243.125,114.375 253.67,124.92 254.023,124.92 254.329,124.92 254.375,124.92 255.8,126.345 258.852,126.345 259.338,125.858 261.947,125.858 v1(263.696,127.607)
  Bottom Layer w0.25: D11.17 251.993,135.507 251.993,127.382 X3.5@254.797,124.578 ; v1(263.696,127.607) 263.75,127.552 263.75,102.855 X4.11
D0: D3.1 D8.9 D9.3 D11.18 | length 159.3
  Top Layer w0.25: D8.9 v1(187.5,102.5) ; v1(187.5,143.75) v1(221.25,143.75) 242.5,143.75 243.75,142.5 D11.18 ; v1(221.25,112.5) D9.3
  Bottom Layer w0.25: D3.1 v1(187.5,102.5) v1(187.5,143.75) ; v1(221.25,112.5) v1(221.25,143.75)
D1: D3.2 D8.10 D9.4 D11.16 | length 167.4
  Top Layer w0.25: D8.10 182.5,100 v1(183.75,98.75) ; v1(183.75,85) D3.2 ; v1(183.75,111.25) 212.5,111.25 215,108.75 223.75,108.75 D9.4 ; v1(183.75,136.25) 220,136.25 222.5,138.75 243.75,138.75 245,137.5 D11.16
  Bottom Layer w0.25: v1(183.75,85) v1(183.75,98.75) v1(183.75,111.25) v1(183.75,136.25)
D2: D3.3 D8.11 D9.7 D11.14 | length 189.8
  Top Layer w0.25: v1(175,82.5) D3.3 ; v1(175,97.5) D8.11 ; v1(175,103.75) 223.75,103.75 D9.7 ; v1(175,131.25) 243.75,131.25 245,132.5 D11.14
  Bottom Layer w0.25: v1(175,82.5) v1(175,131.25)
D3: D3.4 D8.13 D9.8 D11.12 | length 149.4
  Top Layer w0.25: D3.4 v1(191.25,80) ; v1(191.25,95) D8.13 ; v1(191.25,101.25) 223.75,101.25 D9.8 ; v1(191.25,123.75) v1(197.5,123.75) ; v1(197.5,128.75) 211.25,128.75 213.75,126.25 221.25,126.25 223.75,128.75 242.5,128.75 243.75,127.5 D11.12
  Bottom Layer w0.25: v1(191.25,80) v1(191.25,95) v1(191.25,101.25) v1(191.25,123.75) ; v1(197.5,123.75) v1(197.5,128.75)
D4: D3.5 D8.14 D9.13 D10.4 D11.9 | length 200.4
  Top Layer w0.25: D3.5 v1(190,77.5) ; v1(190,86.25) 196.25,86.25 197.5,85 208.125,85 209.375,83.75 217.5,83.75 221.25,87.5 v1(233.75,87.5) v1(250,87.5) ; v1(190,97.5) D8.14 ; v1(190,118.75) 190.081,118.831 237.258,118.831 v1(237.338,118.912) ; v1(237.5,127.5) D11.9 ; v1(250,75) D10.4
  Bottom Layer w0.25: v1(190,77.5) v1(190,86.25) v1(190,97.5) v1(190,118.75) ; D9.13 233.75,98.75 v1(233.75,87.5) ; v1(237.338,118.912) 237.419,118.992 237.419,127.419 v1(237.5,127.5) ; v1(250,75) v1(250,87.5)
D5: D3.6 D8.15 D9.14 D10.5 D11.7 | length 164.1
  Top Layer w0.25: v1(188.75,91.25) 221.25,91.25 223.75,88.75 v1(231.25,88.75) v1(247.5,88.75) ; v1(188.75,100) D8.15 ; v1(235,132.5) D11.7 ; v1(250,72.5) D10.5
  Bottom Layer w0.25: D3.6 188.75,76.25 v1(188.75,91.25) v1(188.75,100) ; v1(231.25,88.75) 231.25,101.25 D9.14 233.75,103.75 233.75,116.875 235,118.125 v1(235,132.5) ; v1(247.5,88.75) 248.75,87.5 248.75,73.75 v1(250,72.5)
D6: D3.7 D8.16 D9.17 D10.12 D11.5 | length 268
  Top Layer w0.25: D3.7 v1(191.25,72.5) ; v1(191.25,60) 252.5,60 255,60 v1(260,65) ; v1(193.75,152.5) v1(230,152.5) ; v1(230,136.25) 238.75,136.25 D11.5
  Bottom Layer w0.25: v1(191.25,60) v1(191.25,72.5) 191.25,77.5 192.5,78.75 192.5,100 D8.16 193.75,103.75 v1(193.75,152.5) ; v1(230,152.5) v1(230,136.25) 231.25,135 231.25,111.25 D9.17 ; v1(260,65) 260,70 D10.12
D7: D3.8 D8.17 D9.18 D10.13 D11.3 | length 295.4
  Top Layer w0.25: v1(185,70) D3.8 ; v1(185,113.75) v1(192.5,113.75) 231.25,113.75 D9.18 ; v1(185,141.25) 238.75,141.25 D11.3 ; v1(188.75,58.75) v1(263.75,58.75) 263.75,68.604 263.604,68.75 260.771,68.75 260.625,68.896 260.625,73.125 D10.13 ; v1(192.5,105) D8.17
  Bottom Layer w0.25: v1(185,70) v1(185,113.75) v1(185,141.25) ; D3.8 187.696,70 188.75,68.946 v1(188.75,58.75) ; v1(192.5,105) v1(192.5,113.75)
DS#: D4.2 D4.14 D7.12 X1.A11 | length 72.8
  Top Layer w0.25: D4.2 211.25,110 213.75,107.5 D4.14
  Bottom Layer w0.25: X1.A11@216.25,45 216.25,75 ; D7.12 216.25,75 ; D4.14 216.25,106.25 216.25,75
GND: C1.2 C2.1 C3.1 C4.1 C5.1 C6.1 D1.7 D2.7 D3.10 D4.8 D5.8 D6.7 D7.7 D8.12 D8.18 D9.1 D9.10 D10.8 D11.10 X1.A28 X1.A29 X1.A30 X3.1 X3.2 X3.3 X3.4 X4.18 X4.19 X4.20 X4.21 X4.22 X4.23 X4.24 X4.25 | length 612.9
  Top Layer w0.5: v2(176.25,106.25) 182.5,106.25 183.75,107.5 D8.18 ; v2(176.25,128.75) C4.1 ; v2(180,61.25) v2(187.5,61.25) v2(210,61.25) v2(212.5,61.25) v2(225,61.25) ; D8.12 185,95 186.25,93.75 210,93.75 ; D4.8 210,93.75 ; D9.10 223.75,93.75 210,93.75 ; v2(232.5,61.25) v2(240,61.25)
  Top Layer w1: v2(161.25,95) v2(176.25,95) D8.12 ; D1.7 211.545,123.455 238.455,123.455 D11.10 242.607,125 244.257,123.35 248.35,123.35 252.66,127.66 X3.4@256.869,127.66 ; v2(225,61.25) v2(232.5,61.25) ; 225,123.75 D5.8 ; C1.2@232.5,53.75 C1.2@254.5,53.75 ; v2(240,61.25) 251.25,61.25 D10.8
  Bottom Layer w0.5: v2(176.25,95) v2(176.25,106.25) v2(176.25,128.75) ; v2(180,61.25) D8.12 ; v2(187.5,61.25) D3.10 ; v2(210,61.25) D7.7 211.25,66.25 211.25,87.5 C5.1 C5.1@211.881,89.369 ; C3.1 v2(212.5,61.25) ; v2(225,61.25) D2.7 225.21,65.21 225.933,65.21 226.25,65.528 226.25,116.25 D9.1 ; C6.1 240,113.125 240,83.75 241.25,82.5 241.25,66.25 D6.7 ; 258.75,49.375 258.75,49.5
  Bottom Layer w1: C4.1 190,155 ; D4.8 211.875,95 ; D1.7 211.88,125 ; 211.88,95 211.88,125 ; C5.1@211.881,89.369 211.881,95 ; 212.5,155 C2.1 212.2,149.7 212.2,149.149 212.165,149.114 212.165,125.285 211.88,125 ; D9.1 D5.8 ; C1.2@232.5,53.75 v2(232.5,61.25) ; C6.1 240,119.375 D11.10 ; v2(240,61.25) D6.7 ; C1.2@254.5,53.75 258.75,49.5 ; D10.8 259.375,60.625 259.375,49.92
NetD1_1: D1.1 D5.6 | length 26.8
  Top Layer w0.25: D1.1 v1(215,140) ; v1(215,128.75) 221.25,128.75 222.5,130 D5.6
  Bottom Layer w0.25: v1(215,128.75) v1(215,140)
NetD1_4: D1.4 D6.1 D6.9 | length 102.2
  Top Layer w0.25: D1.4 212.442,132.5 213.692,133.75 235,133.75 v1(236.25,135) ; D6.1 v1(243.75,80)
  Bottom Layer w0.25: v1(236.25,135) 236.25,122.188 235.625,121.563 235.625,105.625 236.25,105 236.25,83.75 D6.1 ; v1(243.75,80) 245,78.75 245,70 D6.9
NetD1_9: D1.9 D4.9 | length 37.8
  Top Layer w0.25: v1(213.75,95) D4.9
  Bottom Layer w0.25: v1(213.75,95) 213.75,117.5 216.25,120 216.25,126.25 D1.9
NetD1_10: D1.10 D9.11 | length 49.3
  Top Layer w0.25: D1.10 v1(220,130) ; v1(220,96.25) 226.25,96.25 227.5,95 D9.11
  Bottom Layer w0.25: v1(220,96.25) v1(220,130)
NetD1_12: D1.12 D4.10 | length 71
  Top Layer w0.25: v1(201.25,96.25) 211.25,96.25 212.5,97.5 D4.10 ; v1(201.25,133.75) 211.25,133.75 212.5,135 D1.12
  Bottom Layer w0.25: v1(201.25,96.25) v1(201.25,133.75)
NetD1_13: D1.13 D10.9 | length 160.3
  Top Layer w0.25: v1(205,56.25) 223.75,56.25 225,57.5 v1(261.25,57.5) ; v1(205,138.75) 213.75,138.75 215,137.5 D1.13
  Bottom Layer w0.25: v1(205,56.25) v1(205,138.75) ; v1(261.25,57.5) 262.5,58.75 D10.9
NetD2_5: D2.5 D2.10 D2.13 D7.3 | length 39.6
  Top Layer w0.25: D7.3 211.25,76.25 226.25,76.25 227.5,77.5 D2.13 ; D2.5 D2.10
  Bottom Layer w0.25: D2.10 231.25,71.25 231.25,76.25 D2.13
NetD2_6: D2.6 D8.23 | length 81.8
  Top Layer w0.25: D8.23 v1(200,120) ; v1(200,68.75) 218.75,68.75 220,67.5 D2.6
  Bottom Layer w0.25: v1(200,68.75) v1(200,120)
NetD2_8: D2.8 D8.22 | length 92.8
  Top Layer w0.25: D8.22 v1(198.75,117.5) ; v1(198.75,63.75) 206.25,63.75 207.5,62.5 219.375,62.5 220.625,63.75 227.5,63.75 228.75,65 D2.8
  Bottom Layer w0.25: v1(198.75,63.75) v1(198.75,117.5)
NetD2_11: D2.11 D8.19 | length 76.8
  Top Layer w0.25: D8.19 v1(197.5,110) ; v1(197.5,71.25) 231.25,71.25 D2.11
  Bottom Layer w0.25: v1(197.5,71.25) v1(197.5,110)
NetD3_9: D3.9 D7.8 | length 31
  Top Layer w0.25: D3.9 191.25,67.5 192.5,66.25 216.25,66.25 D7.8
NetD4_5: D4.5 D11.1 D11.19 | length 86
  Top Layer w0.25: v1(208.75,147.5) D11.1 243.75,147.5 246.25,145 D11.19
  Bottom Layer w0.25: v1(208.75,147.5) 208.75,102.5 D4.5
NetD4_12: D4.12 D5.4 D5.5 | length 96.8
  Top Layer w0.25: v1(207.5,115) v1(215,115) ; v1(207.5,151.25) v1(226.25,151.25) ; v1(215,102.5) D4.12
  Bottom Layer w0.25: v1(207.5,115) v1(207.5,151.25) ; v1(215,102.5) v1(215,115) ; D5.5 D5.4 226.25,136.25 v1(226.25,151.25)
NetD5_2: D5.2 D6.6 | length 96
  Top Layer w0.25: v1(222.5,85) v1(242.5,85) ; D6.6 v1(242.5,67.5)
  Bottom Layer w0.25: v1(222.5,85) 222.5,137.5 D5.2 ; v1(242.5,67.5) v1(242.5,85)
NetD5_3: D5.3 D5.7 D6.12 | length 86.6
  Top Layer w0.25: v1(225,86.25) v1(246.25,86.25)
  Bottom Layer w0.25: v1(225,86.25) 223.75,87.5 223.75,127.5 ; D5.7 223.75,127.5 ; D5.3 223.75,136.25 223.75,127.5 ; v1(246.25,86.25) 246.25,76.25 D6.12
NetD5_9: D5.9 D7.13 D8.20 | length 99.3
  Top Layer w0.25: D8.20 v1(202.5,112.5) ; v1(202.5,78.75) 212.5,78.75 213.75,77.5 D7.13 ; v1(202.5,120) v1(232.5,120)
  Bottom Layer w0.25: v1(202.5,78.75) v1(202.5,120) ; v1(232.5,120) D5.9
NetD5_12: D5.12 D6.8 | length 89.3
  Top Layer w0.25: v1(230,63.75) 246.25,63.75 D6.8 ; v1(230,132.5) D5.12
  Bottom Layer w0.25: v1(230,63.75) v1(230,132.5)
NetD5_13: D5.13 D5.14 D6.13 | length 85.3
  Top Layer w0.25: v1(227.5,78.75) 246.25,78.75 D6.13 ; v1(227.5,135) D5.13
  Bottom Layer w0.25: v1(227.5,78.75) 227.5,121.25 226.25,122.5 226.25,133.75 v1(227.5,135) ; D5.13 D5.14
NetD7_6: D7.6 D7.9 | length 7.5
  Top Layer w0.25: D7.6 D7.9
NetD7_10: D7.10 D7.11 | length 2.5
  Bottom Layer w0.25: D7.10 D7.11
NetX1_A24: X1.A24 X1.B24 | length 7.5
  Top Layer w0.25: X1.B24@248.75,45 v1(248.75,48.75)
  Bottom Layer w0.25: X1.A24@248.75,45 v1(248.75,48.75)
NetX1_A25: X1.A25 X1.B25 | length 7.5
  Top Layer w0.25: X1.B25@251.25,45 v1(251.25,48.75)
  Bottom Layer w0.25: X1.A25@251.25,45 v1(251.25,48.75)
OD0: D9.2 X3.6 X4.2 | length 55.6
  Top Layer w0.25: D9.2 229.661,115 230.808,116.146 233.854,116.146 240,110 240,108.271 240.146,108.125 243.125,108.125 243.75,108.75 243.75,113.75 253.841,123.841 255.716,123.841 X3.6@256.914,125.039 ; X3.6 264.12,125.085 X4.2
OD1: D9.5 X3.8 X4.3 | length 55.8
  Top Layer w0.25: D9.5 226.875,107.5 230.625,111.25 235,111.25 240.625,105.625 244.375,105.625 245,106.25 245,112.5 253.817,121.317 255.692,121.317 256.881,122.506 X3.8@257.236,122.861 ; X3.8@256.842,122.545 264.346,122.545 265.282,123.48 X4.3
OD2: D9.6 X3.10 X4.4 | length 55.5
  Top Layer w0.25: D9.6 226.875,105 230.625,108.75 234.375,108.75 240,103.125 245,103.125 246.25,104.375 246.25,111.25 253.725,118.725 255.6,118.725 256.915,120.04 264.196,120.04 264.866,120.71 X4.4
OD3: D9.9 X3.12 X4.5 | length 53.2
  Top Layer w0.25: D9.9 228.646,101.146 238.229,101.146 238.75,100.625 245,100.625 247.5,103.125 247.5,110 253.731,116.231 255.606,116.231 257.095,117.72 265.065,117.72 X4.5
OD4: D9.12 X3.14 X4.6 | length 44.1
  Top Layer w0.25: D9.12 232.865,97.5 233.49,98.125 245,98.125 248.75,101.875 248.75,108.762 253.615,113.627 255.571,113.627 257.009,115.065 265.18,115.065 X4.6
OD5: D9.15 X3.16 X4.7 | length 51.7
  Top Layer w0.25: D9.15 v1(235,102.5) ; v1(235,95.625) 245,95.625 250,100.625 250,107.5 253.597,111.097 255.472,111.097 256.785,112.41 265.275,112.41 X4.7
  Bottom Layer w0.25: v1(235,95.625) v1(235,102.5)
OD6: D9.16 X3.18 X4.8 | length 56.2
  Top Layer w0.25: D9.16 232.758,107.242 233.383,107.242 236.723,103.902 237.348,103.902 v1(237.5,103.75) ; v1(237.5,93.125) 245.422,93.125 251.25,98.953 251.25,106.25 253.593,108.593 255.468,108.593 256.63,109.755 265.16,109.755 X4.8
  Bottom Layer w0.25: v1(237.5,93.125) v1(237.5,103.75)
OD7: D9.19 X3.20 X4.9 | length 65.4
  Top Layer w0.25: D9.19 237.973,109.527 238.598,109.527 v1(238.75,109.375) ; v1(238.75,90.625) 245.625,90.625 252.5,97.5 252.5,105 253.525,106.025 255.589,106.025 256.904,107.34 264.386,107.34 264.866,106.86 X4.9
  Bottom Layer w0.25: v1(238.75,90.625) v1(238.75,109.375)
RES#: D1.2 D1.3 D10.1 X1.A21 | length 172.5
  Top Layer w0.25: v1(206.25,135) D1.3 ; v1(207.5,55) 225.479,55 226.729,56.25 v1(241.25,56.25) ; D10.1 v1(258.75,82.5)
  Bottom Layer w0.25: v1(206.25,135) 206.25,56.25 v1(207.5,55) ; D1.3 D1.2 ; X1.A21@241.25,45 v1(241.25,56.25) 243.75,56.25 253.75,66.25 256.25,66.25 258.75,68.75 v1(258.75,82.5)
ROM#: D5.1 D5.10 D5.15 X1.B2 | length 199.1
  Top Layer w0.25: v1(172.5,47.5) 192.5,47.5 193.75,46.25 X1.B2@193.75,45 ; v1(172.5,142.5) D5.1 v1(227.5,142.5) ; v1(227.5,127.5) D5.10 ; v1(227.5,140) D5.15
  Bottom Layer w0.25: v1(172.5,47.5) v1(172.5,142.5) ; v1(227.5,127.5) 227.5,132.5 228.75,133.75 228.75,138.75 v1(227.5,140) v1(227.5,142.5)
RW: D2.3 D3.11 D4.1 D4.15 D5.11 D6.10 D7.4 | length 144.9
  Top Layer w0.25: D3.11 v1(201.25,65) ; v1(202.5,72.5) D7.4 213.75,72.5 215,73.75 220,73.75 221.25,75 D2.3 227.5,75 v1(228.75,76.25) v1(243.75,76.25) ; D4.1 215,112.5 D4.15 218.75,111.25 v1(228.75,111.25) ; v1(228.75,130) D5.11 ; v1(243.75,70) D6.10
  Bottom Layer w0.25: v1(201.25,65) 202.5,66.25 v1(202.5,72.5) ; v1(228.75,76.25) v1(228.75,111.25) v1(228.75,130) ; v1(243.75,70) v1(243.75,76.25)
STR#: D1.5 X1.B21 | length 189.7
  Top Layer w0.25: v1(171.25,55) 205,55 206.25,53.75 225.625,53.75 228.125,51.25 238.125,51.25 241.25,48.125 X1.B21@241.25,45 ; v1(171.25,130) D1.5
  Bottom Layer w0.25: v1(171.25,55) v1(171.25,130)
УП1: D10.2 X3.27 | length 20
  Bottom Layer w0.25: X3.27 252.5,95.316 252.5,92.5 256.25,88.75 256.25,81.25 D10.2
УП1#: D10.3 X3.28 | length 22
  Bottom Layer w0.25: D10.3 257.317,79.817 257.317,86.067 258.75,87.5 258.75,95.263 X3.28
УП2: D10.7 X3.25 | length 34.6
  Bottom Layer w0.25: X3.25 251.702,97.058 251.702,91.473 253.75,89.425 253.75,68.75 D10.7
УП2#: D10.6 X3.26 | length 39.4
  Top Layer w0.25: D10.6 255.258,70.258 255.883,70.258 v1(260,74.375)
  Bottom Layer w0.25: X3.26@256.869,99.521 259.229,99.521 261.875,96.875 261.875,87.422 264.375,84.922 264.375,76.875 263.625,76.125 261.75,76.125 v1(260,74.375)
УП3: D10.10 X3.23 X4.16 | length 85.8
  Top Layer w0.25: v1(252.5,68.75) 257.5,68.75 258.75,67.5 D10.10
  Bottom Layer w0.25: v1(252.5,68.75) 252.5,88.939 250.884,90.555 250.884,98.78 X3.23 254.329,102.335 255.175,103.181 255.175,103.879 255.554,104.257 255.554,105.182 256.361,105.99 257.907,105.99 263.896,100 266.104,100 266.754,100.65 266.754,120.719 X4.16
УП3#: D10.11 X3.24 | length 37.4
  Top Layer w0.25: D10.11 D10.11@262.758,70.258
  Bottom Layer w0.25: X3.24 258,102.225 262.806,97.419 262.806,87.67 265.124,85.353 265.124,73.533 262.758,71.167 D10.11@262.758,70.258
УП4: D10.15 X3.21 X4.1 | length 77.6
  Top Layer w0.25: v1(251.25,78.75) 256.875,78.75 258.125,80 D10.15 ; X3.21 255.608,103.485 262.86,103.485 265,105.625 266.25,105.625 266.759,106.134 266.759,126.991 265.582,128.168 265.582,128.723 X4.1
  Bottom Layer w0.25: v1(251.25,78.75) 251.25,88.125 250,89.375 250,100.436 X3.21
УП4#: D10.14 X3.22 | length 32.3
  Bottom Layer w0.25: X3.22 255.625,103.521 255.625,99.125 cw(c255.375,99.125) 255.615,99.057 256.268,98.405 259.095,98.405 260.625,96.875 260.625,79.375 D10.14
Ф1: D1.6 X1.A14 | length 161.8
  Top Layer w0.25: v1(177.5,81.25) 200,81.25 201.25,82.5 222.334,82.5 v1(222.5,82.666) ; v1(177.5,126.25) 198.75,126.25 200,127.5 D1.6
  Bottom Layer w0.25: v1(177.5,81.25) v1(177.5,126.25) ; v1(222.5,82.666) 222.5,82.5 223.75,81.25 X1.A14@223.75,45
pads on no net: D4.4 D4.6 D4.7 D4.11 D6.3 D6.11 X1.A1 X1.A2 X1.A12 X1.A13 X1.A16 X1.A17 X1.A18 X1.A19 X1.A20 X1.A22 X1.A23 X1.A26 X1.A27 X1.B1 X1.B15 X1.B16 X1.B17 X1.B18 X1.B20 X1.B22 X1.B23 X1.B26 X1.B27 X4.0 X4.10 X4.12 X4.13 X4.14 X4.15 X4.17

## Polygon pours and split planes (outlines as drawn)
GND on Bottom Layer "Bottom Layer-No Net" (solid, pour order 3): 270.41,119.16 267.91,116.66 267.91,97.16 269.375,95.695 269.375,86.875 266.875,84.375 266.875,51.875 258.125,51.875 258.125,44.375 272.5,44.375 272.5,148.41 265.41,148.41 265.41,143.34 270.41,138.34
GND on Bottom Layer "Bottom Layer-No Net 2" (solid, pour order 1): 162.456,147.8 167.2,151.932 167.2,157.453 180,157.5 180,153.75 177.5,153.75 161.25,137.5 161.25,43.75 157.5,43.75 157.5,147.8
GND on Bottom Layer "Bottom Layer-No Net 3" (solid, pour order 0): 186.25,36.25 157.5,36.25 157.5,45 186.25,45
GND on Bottom Layer "Bottom Layer-No Net 1" (solid, pour order 2): 178.75,157.5 261.25,157.5 261.25,152.5 266.25,147.5 266.25,143.125 265.625,143.125 262.5,146.25 253.75,146.25 250,150 236.25,150 232.5,153.75 178.75,153.75
+5В on Top Layer "Bottom Layer-No Net 2" (solid, pour order 4): 167.2,157.5 167.2,152.06 162.467,147.8 157.5,147.8 157.5,88.125 161.25,85.625 161.25,137.5 177.5,153.75 180,153.75 180,157.5
+5В on Top Layer "Bottom Layer-No Net 1" (solid, pour order 5): 178.75,157.5 261.25,157.5 261.25,152.5 266.25,147.5 267,147.5 267,144 258.933,144 256.083,146.25 248.75,146.25 245,150 232.5,150 232.5,153.75 178.75,153.75
no net on Top Overlay (solid): 178.75,154.375 183.75,154.375 183.75,151.875 181.25,151.875 181.25,144.875 178.75,144.875
no net on Top Overlay (solid): 192.25,151.875 194.75,151.875 194.75,144.875 197.25,144.875 197.25,151.875 199.75,151.875 199.75,154.375 192.25,154.375
no net on Top Overlay (solid): 168.75,149.375 168.75,144.875 175.25,151.375 175.25,149.375 173.25,149.375 173.25,146.875 175.75,146.875 175.75,144.875 177.75,144.875 177.75,154.375 173.75,154.375
no net on Top Overlay (solid): 182.25,144.875 182.25,149.375 187.25,154.375 191.25,154.375 191.25,144.875 189.25,144.875 189.25,146.875 186.75,146.875 186.75,149.375 188.75,149.375 188.75,151.375

## Keep-outs
Keep-Out Layer:
  lines w0.1: 157.2,34.7 158.3,33.6 189.5,33.6 189.5,18.5 190.2,17.8 264.3,17.8 265,18.5 265,33.625 268.238,33.625 271.625,33.625 273,35 273,157 271.5,158.5 158.8,158.5 157.2,156.9 157.2,34.7

## Other copper
Top Layer:
  rectangle net +5В: 258.125,45 271.25,51.25
  region net +5В: 272.25,48 272.25,148 265.375,148 263.5,149.875 263.5,144.25 270.375,137.375 270.375,87.375 266,83 266,48
Bottom Layer:
  rectangle net GND: 253.75,127.46 257.5,131.875
  region net GND: 255.625,131.875 271.25,131.875 270.625,131.25 270.625,130.625 255.625,130.625
  text "emuverse.ru / agatcomp.ru" at 182.5,38.125 h2

## Silkscreen, mask and mechanical layers (free items; w line width, h text height)
Top Overlay:
  lines w0.1: 145.9,10 289.375,10 289.375,170.625 145.9,170.625 145.9,10
  text "Контроллер принтера" at 160,137.81 h5
  text "Фг3.089.174" at 160,132.5 h5
  text "Реплика 2023" at 160,126.882 h5
  text "v0.2" at 160.002,121.28 h5

## Text inside footprints (layer, text, board x,y; h text height)
X1: Top Overlay "B30" at 265.6,34.684 h2; Top Overlay "B1" at 186.2,34.684 h2; Bottom Overlay "A30" at 270.992,34.584 h2; Bottom Overlay "A1" at 188.892,34.684 h2